# Altium PCB RFM69HCW_BOB.PcbDoc
Units mil, origin at the board's own origin, x right, y up, seen from the top; angles counter-clockwise.
Board outline 1100 x 800 mil, 2 copper layers (Top, Bottom), stack 61.811 mil thick; 13 components, 14 nets, 38 pads, 15 vias.
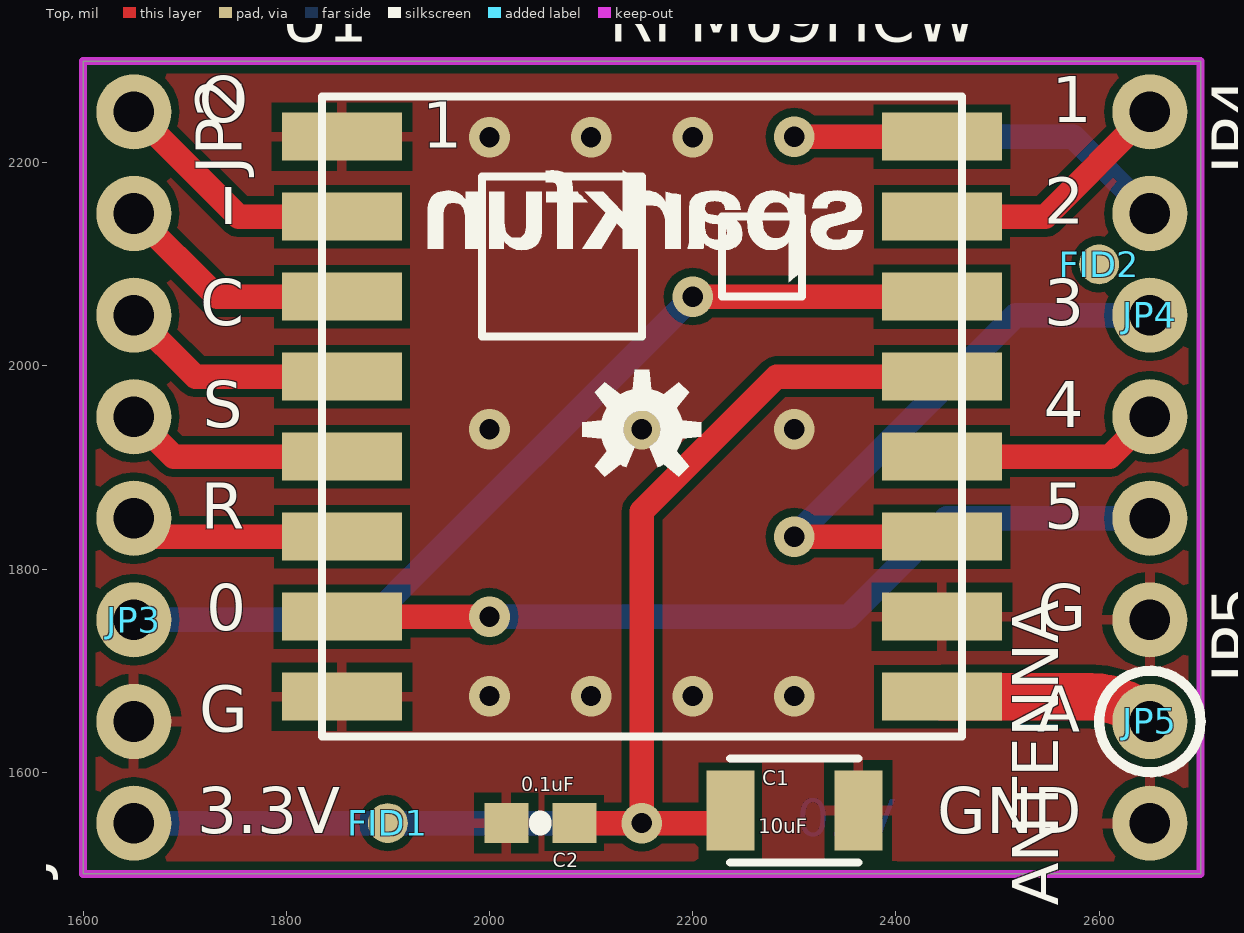
[diagram p0: Top view]
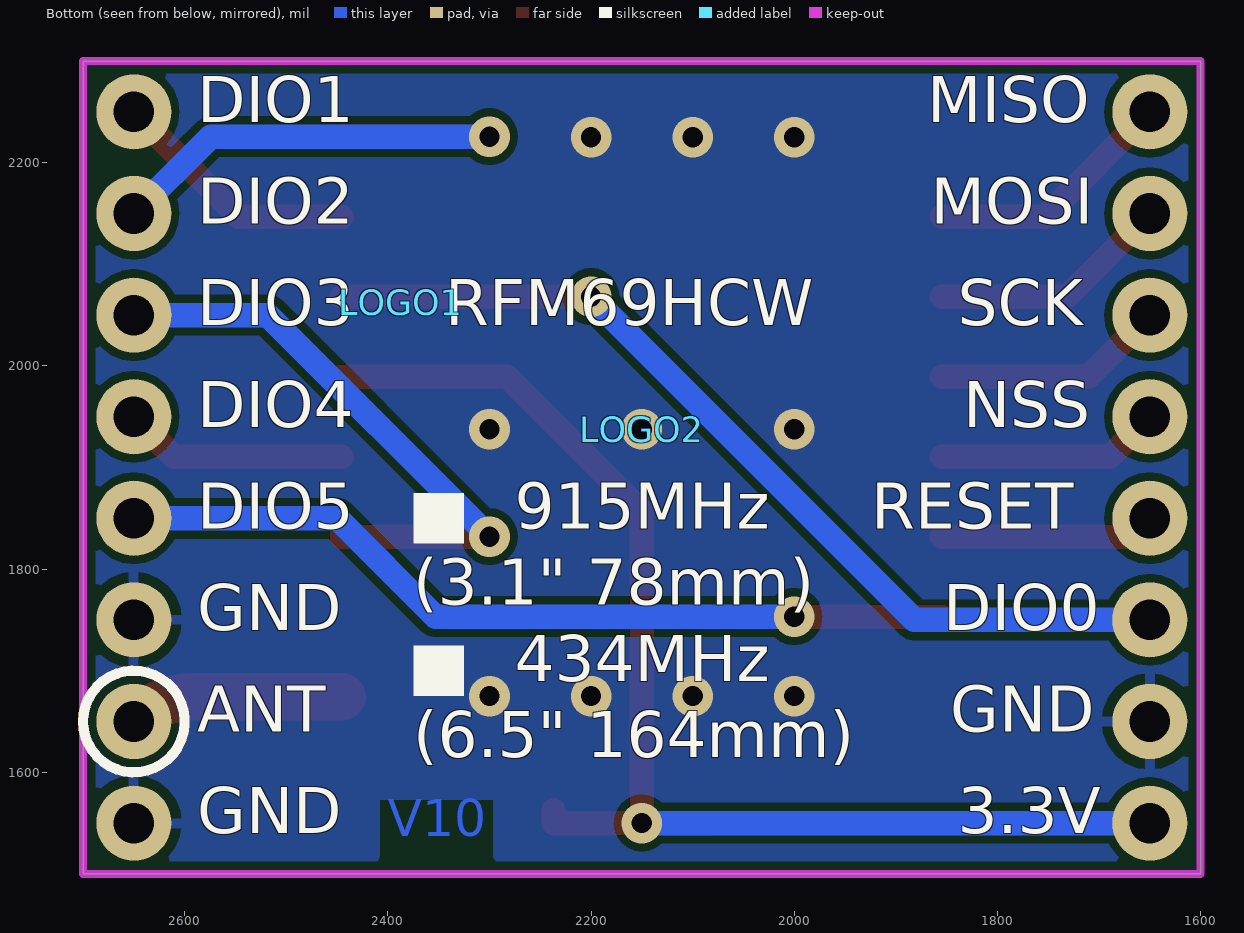
[diagram p1: Bottom view, seen from below]

## Layer stack, top to bottom
Top Solder: solder mask 0.4, Solder Resist, Dk 3.5
Top: signal copper 1.378
Dielectric 1: core 59.0551, FR-4, Dk 4.8
Bottom: signal copper 1.378
Bottom Solder: solder mask 0.4, Solder Resist, Dk 3.5

## Board outline
1600,1500 2700,1500 2700,2300 1600,2300

## Design rules (kind name [scope] priority, off if disabled: settings)
Clearance [All] p1: gap=8 except(0: SMDPad-SMDPad SMDPad-THPad SMDPad-Via)
Clearance "Clearance (Same Net)" [All] p2: gap=0 except(8: SMDPad-SMDPad SMDPad-THPad SMDPad-Via)
HoleSize HoleSize_1 [All] p1: absolutevalues=TRUE maxlimit=100000 minlimit=15 maxpercent=80.000 minpercent=20.000
HoleSize [All] p2: absolutevalues=TRUE maxlimit=100 minlimit=1 maxpercent=80.000 minpercent=20.000
HoleToHoleClearance mdViaViaSameLayer [All] p1: gap=8 allowstackedmicrovias=TRUE
HoleToHoleClearance [All] p2: gap=10 allowstackedmicrovias=TRUE
PasteMaskExpansion mlMinCreamFrame [All] p1: expansion=0
PasteMaskExpansion [All] p2: expansion=0
PolygonConnect ThermalVias [IsVia] p1: connectstyle=Direct reliefconductorwidth=10 reliefentries=4 polygonreliefangle="90 Angle" airgapwidth=10
PolygonConnect [All] p2: connectstyle=Relief reliefconductorwidth=10 reliefentries=4 polygonreliefangle="90 Angle" airgapwidth=10
RoutingVias [All] p1: holewidth=28 width=50 viastyle="Through Hole" minholewidth=28 minwidth=50 maxholewidth=28 maxwidth=50
SilkToSilkClearance [All] p1 off: silktosilkclearance=10
SilkToSolderMaskClearance [IsPad] p1 off: minsilkscreentomaskgap=10 clearancetoexposedcopper=TRUE
SolderMaskExpansion mlMinStopFrame [All] p1: expansion=4
SolderMaskExpansion [All] p2: expansion=4
Width Width_1 [All] p1: maxlimit=100000 minlimit=7 preferedwidth=10
Width [All] p2: maxlimit=10 minlimit=10 preferedwidth=10
25 further rules are at their usual default settings.

## Components (designator, comment, footprint, x,y, rotation, side; value= is the part's Value field where it differs from the comment)
C1 "10uF" 1210 2300,1562.5 r0 top
C2 "0.1uF" 0603-CAP 2050,1550 r180 top
FID1 "" FIDUCIAL-1X2 1900,1550 r0 top
FID2 "" FIDUCIAL-1X2 2600,2100 r0 top
FRAME1 "" CREATIVE_COMMONS 1000,1000 r0 top
JP1 "" 1X02_NO_SILK 1650,1550 r90 top
JP2 "" 1X05_ROUNDONLY_NOSILK 1650,2250 r270 top
JP3 "" 1X01NS 1650,1750 r0 top
JP4 "" 1X05_ROUNDONLY_NOSILK 2650,2250 r270 top
JP5 "ANTENNA" 1X03_ROUND_ONLY_NO_SILK 2650,1750 r270 top
LOGO1 "" SFE_LOGO_NAME_.1 2387.5,2062.5 r180 bottom
LOGO2 "" OSHW-LOGO-S 2150,1937.5 r180 bottom
U1 "RFM69HCW" RFM69HCW-XXXS2 2150,1950 r0 top

## Footprints (in the part's own frame and the unit in brackets; to place one, negate y for a bottom-side part, rotate by r counter-clockwise, add the part's x,y. Pads: shape width x height; smd on the part's side, far side on the other; paste and mask are expansions set on the pad)
1X01NS [mil] "1X01NS"
  round 74 hole 40: 1(0,0)
1X02_NO_SILK [mil] "1X02_NO_SILK"
  round 74 hole 40: 1(0,0) 2(100,0)
1X03_ROUND_ONLY_NO_SILK [mil] "1X03_ROUND_ONLY_NO_SILK"
  round 74 hole 40: 1(0,0) 2(100,0) 3(200,0)
1X05_ROUNDONLY_NOSILK [mil] "1X05_ROUNDONLY_NOSILK"
  round 74 hole 40: 1(0,0) 2(100,0) 3(200,0) 4(300,0) 5(400,0)
0603-CAP [mm] "0603-CAP"
  rect 1.1x1 smd: 1(-0.85,0) 2(0.85,0)
  silkscreen extent 0,-0.03 0,0.03
1210 [mm] "1210"
  rect 1.2x2 smd: 1(-1.6,0) 2(1.6,0)
  silkscreen extent -1.6,-1.3 1.6,1.3
CREATIVE_COMMONS [mil] "CREATIVE_COMMONS"
FIDUCIAL-1X2 [mm] "FIDUCIAL-1X2"
  rrect100% 1x1 smd: 1(0,0)
OSHW-LOGO-S [mil] "OSHW-LOGO-S"
RFM69HCW-XXXS2 [mm] "RFM69HCW-XXXS2"
  rect 3x1.2 smd: 1(-7.5,7) 2(-7.5,5) 3(-7.5,3) 4(-7.5,1) 5(-7.5,-1) 6(-7.5,-3) 7(-7.5,-5) 8(-7.5,-7) 9(7.5,-7) 10(7.5,-5) 11(7.5,-3) 12(7.5,-1) 13(7.5,1) 14(7.5,3) 15(7.5,5) 16(7.5,7)
  silkscreen extent -8,-8 8,8
SFE_LOGO_NAME_.1 [mil] "SFE_LOGO_NAME_.1"

## Part data
C1: library part 1210
C2: library part 0603-CAP
FID1 FID2: library part FIDUCIAL-1X2
FRAME1: library part CREATIVE_COMMONS
JP1: library part 1X02_NO_SILK
JP2 JP4: library part 1X05_ROUNDONLY_NOSILK
JP3: library part 1X01NS
JP5: library part 1X03_ROUND_ONLY_NO_SILK
LOGO1: library part SFE_LOGO_NAME_.1
LOGO2: library part OSHW-LOGO-S
U1: library part RFM69HCW-XXXS2

## Via types
v1: diameter 40/40 (per signal layer), hole 20, Top to Bottom, 15 vias

## Nets (pads, with @x,y where several pads share a name; then routed paths per layer and width w, separated by ;. In a path a pad name is that pad's centre, name@x,y a point inside that pad or via, vN(x,y) a via of type N, cw(c..) or ccw(c..) an arc to the next point about the centre after c; other vN are vias at no path point)
3.3V: C1.1 C2.1 JP1.1 U1.13 | length 1323.1
  Top w24: C2.1 v1(2150,1550) ; C1.1 2237.01,1550 v1(2150,1550) ; U1.13 2282.47,1989.37 2150,1856.9 v1(2150,1550)
  Bottom w24: JP1.1 v1(2150,1550)
ANT: JP5.2 U1.9 | length 145.8
  Top w47: U1.9 2591.07,1674.41
DIO0: JP3.1 U1.14 | length 927
  Top w24: v1(2200,2068.11) U1.14
  Bottom w24: JP3.1 1881.89,1750 v1(2200,2068.11)
DIO1: JP4.1 U1.15 | length 247.4
  Top w24: U1.15 2546.85,2146.85 JP4.1
DIO2: JP4.2 U1.16 | length 526.6
  Top w24: v1(2300,2225.59) U1.16
  Bottom w24: v1(2300,2225.59) 2574.41,2225.59 JP4.2
DIO3: JP4.3 U1.11 | length 585.6
  Top w24: v1(2300,1831.89) U1.11
  Bottom w24: v1(2300,1831.89) 2518.11,2050 JP4.3
DIO4: JP4.4 U1.12 | length 221
  Top w24: U1.12 2610.63,1910.63 JP4.4
DIO5: JP4.5 U1.7 | length 835.4
  Top w24: U1.7 v1(2000,1753.15)
  Bottom w24: v1(2000,1753.15) 2353.15,1753.15 2450,1850 JP4.5
GND: C1.2 C2.2 JP1.2 JP5.1 JP5.3 U1.1 U1.8 U1.10
  other v1: 2000,1675 2100,1675 2200,1675 2300,1675 2000,1937.5 2150,1937.5 2300,1937.5 2000,2225 2100,2225 2200,2225
MISO: JP2.1 U1.2 | length 247.4
  Top w24: JP2.1 1753.15,2146.85 U1.2
MOSI: JP2.2 U1.3 | length 238.6
  Top w24: JP2.2 1731.89,2068.11 U1.3
NSS: JP2.4 U1.5 | length 221
  Top w24: JP2.4 1689.37,1910.63 U1.5
RESET: JP2.5 U1.6 | length 212.2
  Top w24: JP2.5 1668.11,1831.89 U1.6
SCK: JP2.3 U1.4 | length 229.8
  Top w24: JP2.3 1710.63,1989.37 U1.4
pads on no net: FID1.1 FID2.1
copper on no net: | length 65.5
  Top w47: 2591.07,1674.41 cw(c2591.07,1591.07) 2650,1650

## Polygon pours and split planes (outlines as drawn)
GND on Bottom "Bottom-GND" (solid, remove dead copper, pour order 0): 1596,2304 2704,2304 2704,1496 1596,1496
GND on Top "Top-GND" (solid, remove dead copper, pour order 2): 1596,2304 2704,2304 2704,1496 1596,1496

## Keep-outs
Keep-Out Layer:
  the board outline again, w8

## Other copper
Bottom:
  text "V10" at 2400,1525 h62

## Silkscreen, mask and mechanical layers (free items; w line width, h text height)
Top Overlay:
  circle w10: c2650,1650 r50
  text "O" at 1713.77,2225 h77.5
  text "1" at 2553.36,2225 h77.5
  text "I" at 1734.2,2125 h77.5
  text "2" at 2546.04,2125 h77.5
  text "C" at 1715.56,2025 h77.5
  text "3" at 2546.26,2025 h77.5
  text "S" at 1717.78,1925 h77.5
  text "4" at 2545.29,1925 h77.5
  text "R" at 1715.7,1825 h77.5
  text "5" at 2546.04,1825 h77.5
  text "0" at 1721.3,1725 h77.5
  text "G" at 2539.52,1725 h77.5
  text "G" at 1714.52,1625 h77.5
  text "A" at 2539.31,1625 h77.5
  text "3.3V" at 1712.5,1525 h77.5
  text "GND" at 2440.8,1525 h77.5
Bottom Overlay:
  circle w10: c2650,1650 r50
  rectangle: 2325,1825 2375,1875
  rectangle: 2325,1675 2375,1725
  text "MISO" at 1869,2225 h77.5
  text "DIO1" at 2587.5,2225 h77.5
  text "MOSI" at 1865.84,2125 h77.5
  text "DIO2" at 2587.5,2125 h77.5
  text "SCK" at 1839.24,2025 h77.5
  text "RFM69HCW" at 2343.34,2025 h77.5
  text "DIO3" at 2587.5,2025 h77.5
  text "NSS" at 1833.58,1925 h77.5
  text "DIO4" at 2587.5,1925 h77.5
  text "RESET" at 1924.28,1825 h77.5
  text "915MHz" at 2275,1825 h77.5
  text "DIO5" at 2587.5,1825 h77.5
  text "(3.1\" 78mm)" at 2375,1750 h77.5
  text "DIO0" at 1853.15,1725 h77.5
  text "GND" at 2587.5,1725 h77.5
  text "434MHz" at 2275,1675 h77.5
  text "GND" at 1846.7,1625 h77.5
  text "ANT" at 2587.5,1625 h77.5
  text "(6.5\" 164mm)" at 2375,1600 h77.5
  text "3.3V" at 1839.17,1525 h77.5
  text "GND" at 2587.5,1525 h77.5
Dimension:
  the board outline again, w8
tDocu:
  text "M Grusin" at 2250,1000 h108.5

## Dimensions
1600,1500 to 1600,2300 on tDocu
1600,2300 to 2700,2300 on tDocu
1650,1550 to 2650,1550 on tDocu

## Text inside footprints (layer, text, board x,y; h text height)
FRAME1: tDocu "Released under the Creative Commons Attribution Share-Alike 4.0 License" at 200,1200 h108.5; tDocu "https://creativecommons.org/licenses/by-sa/4.0/" at 1000,1100 h108.5; tDocu "Designed by:" at 1450,1000 h108.5
U1: Top Overlay "1" at 1934.06,2200 h77.5